# EAGLE board lf-antenna-usb (EAGLE 6.5.0)
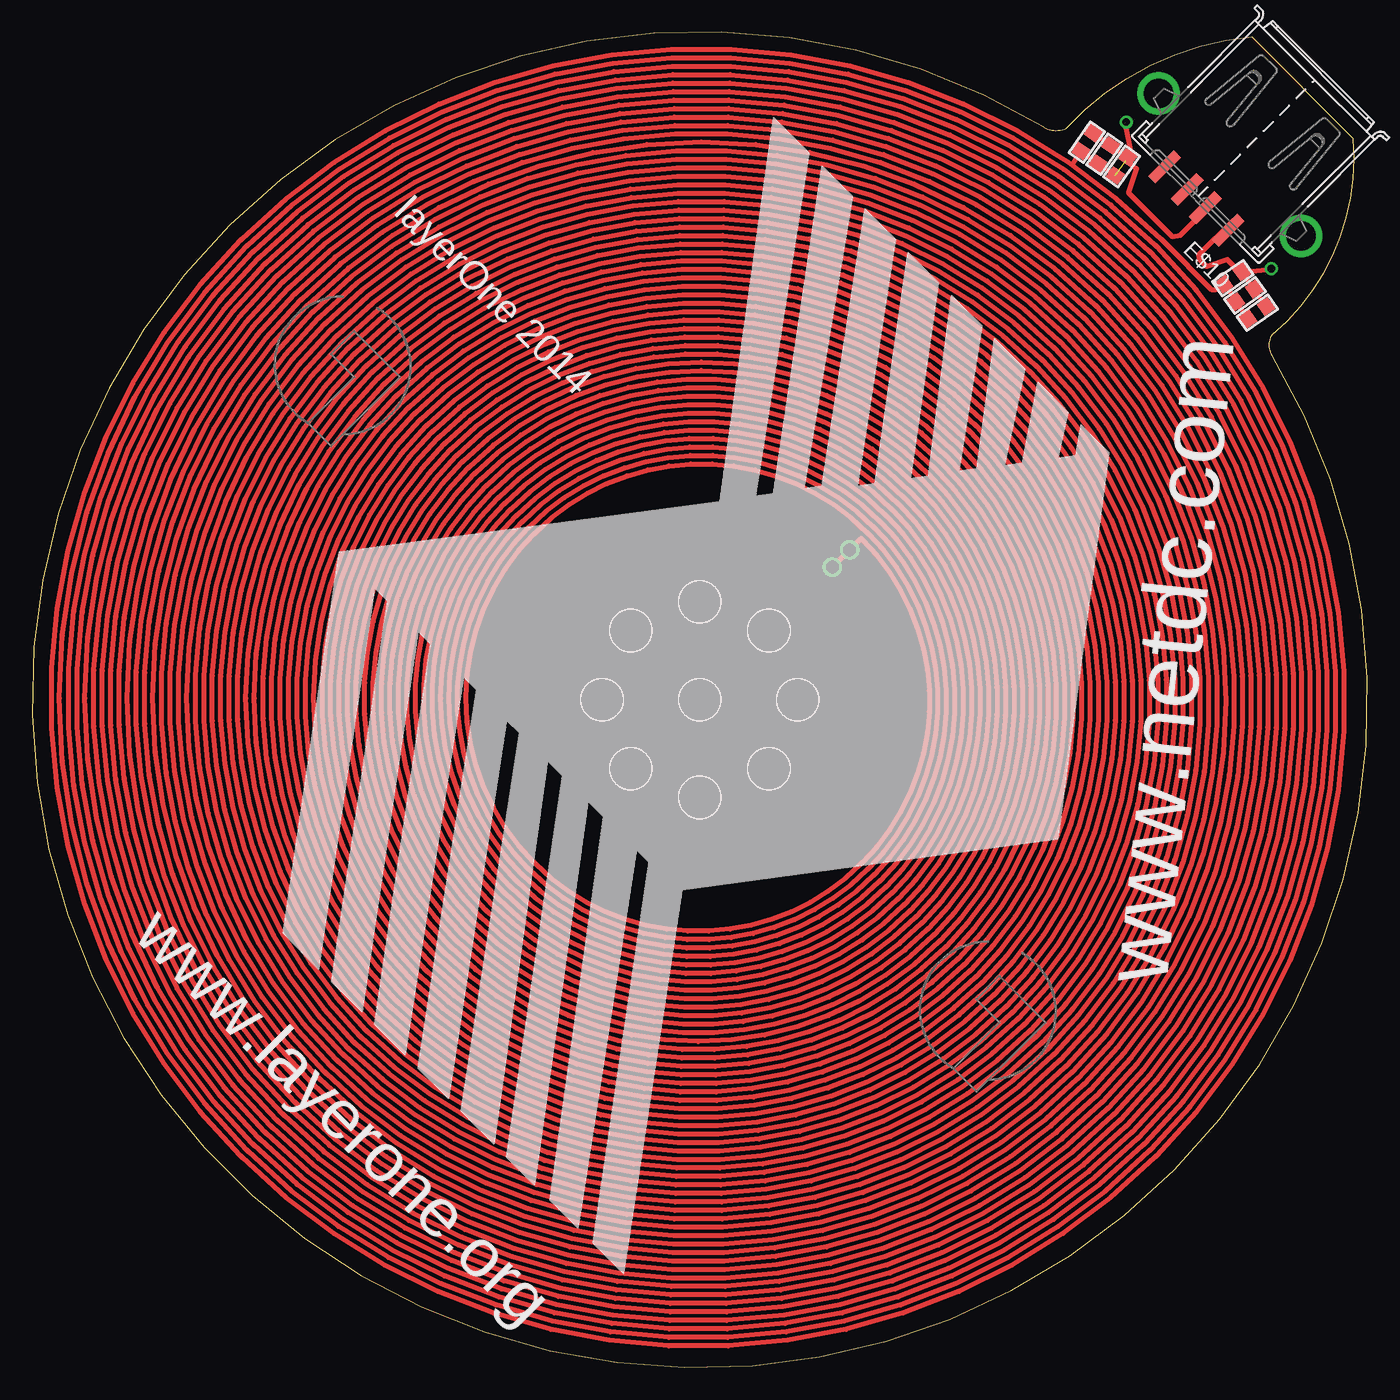
[diagram p0: board, top side]
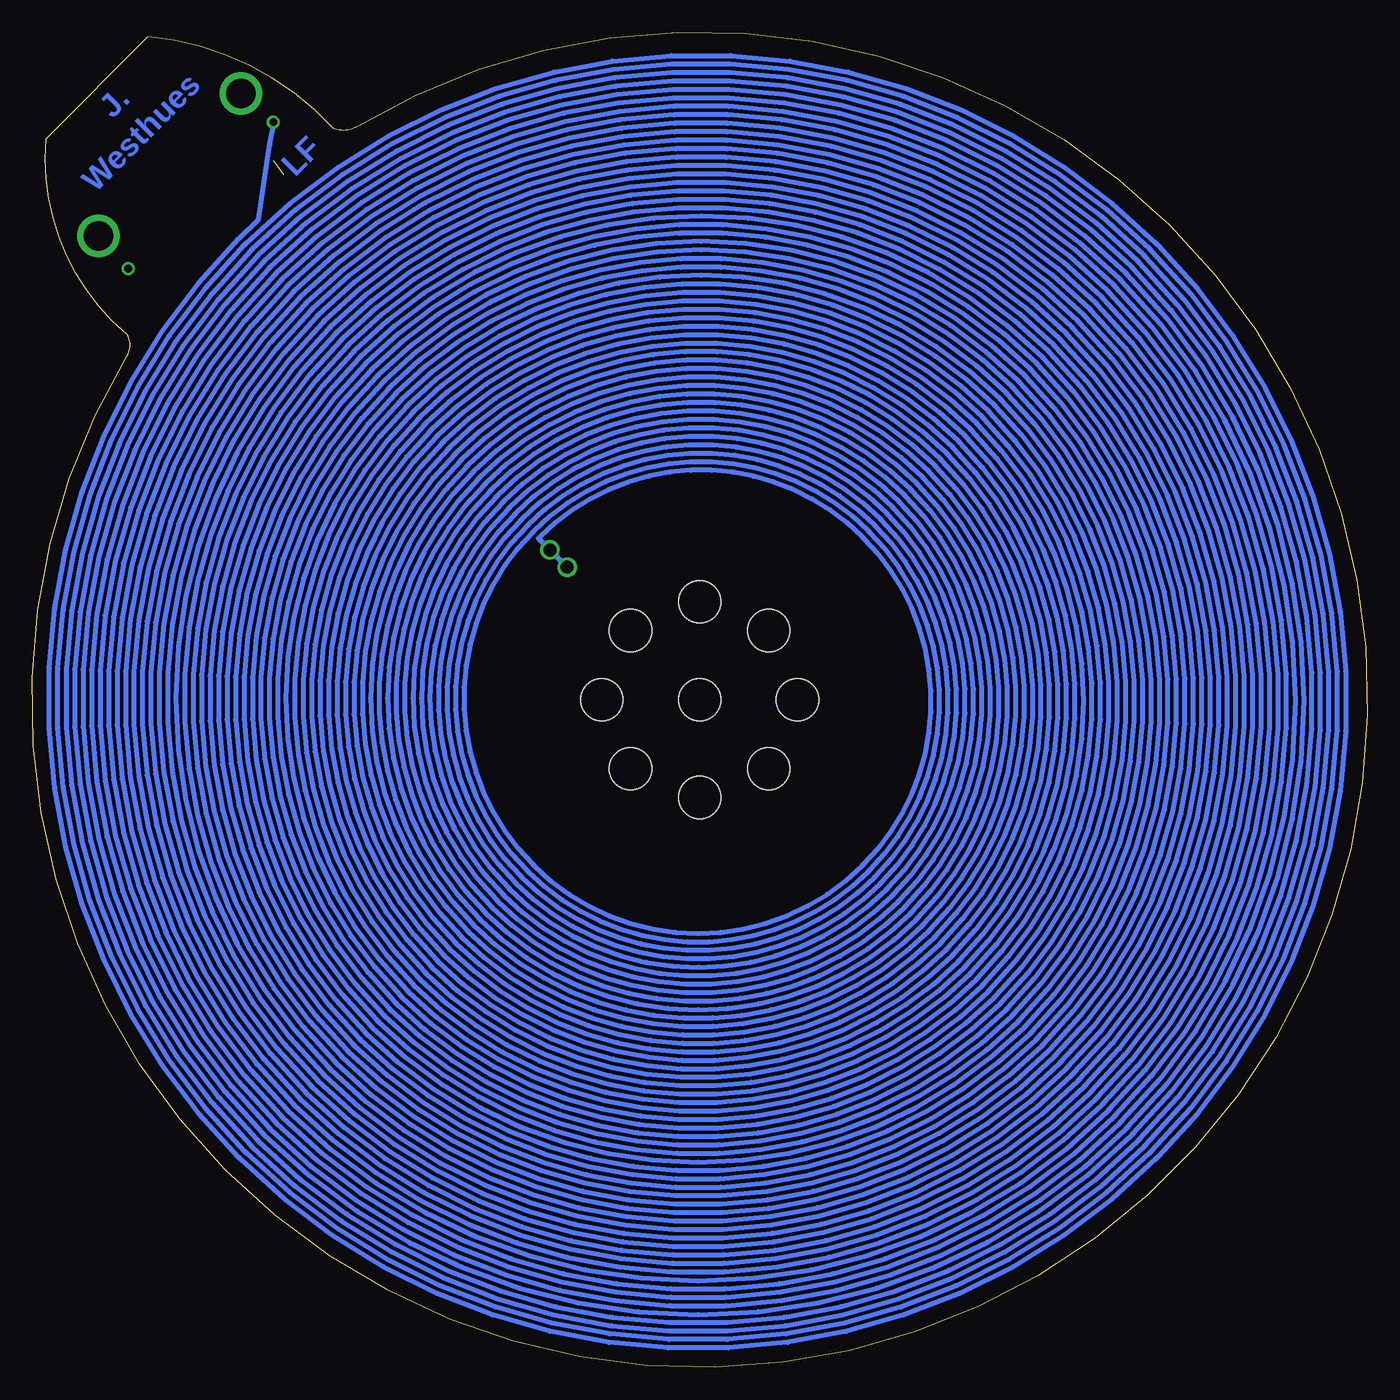
[diagram p1: board, bottom side, seen from below]

Size 104.1 x 104.1 mm. Coordinates in mm from the lower left corner, seen from the top.
Outline: 78.87,96.69 arc332 96.69,78.87 arc-62 96.69,80.52 arc55 103.01,95.8 95.08,103.73 arc42 80.61,96.6 arc-56 78.87,96.69
Copper layers (1*16): Top 0.0356mm / dielectric 1.5011mm / Bottom 0.0356mm
Design rules "SilverCircuits": minimum track width 7mil, minimum drill 14mil, track to track 7mil, track to pad 7mil, pad to pad 7mil, via to via 7mil, smd to smd 0mil, copper to edge 20mil, drill to drill 8mil, minimum pad ring 10mil, minimum via ring 8mil, stop-mask expansion 4mil, vias tented up to drill 0mil, thermal gap 10mil
Holes 3.3 mm at 52.06,52.06 46.67,46.67 46.67,57.44 57.44,46.67 57.44,57.44 52.06,44.44 59.68,52.06 52.06,59.68 44.44,52.06
Milling: 6 lines

## Footprints (pad centres in the part's own frame; a part is rotated, then mirrored left to right if it is on the bottom)
RLC_0603 = smd 1 x 1.1: 1 -0.85,0; 2 0.85,0
CONN_USB_A_F = smd 0.8 x 2.82: 1 -3.5,6.46; 2 -1,6.46; 3 1,6.46; 4 3.5,6.46 | drill 2.3: B1 -7.85,2.75; B2 7.85,2.75

## Placement (x,y rotation side)
E$1  [L1LOGO]  74.51,27.81 135 top
E$2  dnp  [RLC_0603]  84.94,93.62 235 top
E$3  1000 pF  [RLC_0603]  83.59,94.57 235 top
E$4  220 pF  [RLC_0603]  82.23,95.52 235 top
E$5  dnp  [RLC_0603]  95.5,82.22 215 top
E$6  dnp  [RLC_0603]  94.56,83.57 215 top
E$7  zerohm  [RLC_0603]  93.61,84.92 215 top
E$8  [L1LOGO]  24.22,78.1 135 top
E$10  [CONN_USB_A_F]  95.33,95.69 135 top

## Library data of the parts
E$1 E$8 = STM32-PROX
E$2-E$7 =   merged
E$10 = dp_devices; DIGIKEY: AE10332-ND; OEM: AU-Y1006-2-R

## Nets
BUFD: E$5.1 E$6.1 E$7.1
RAW: E$2.1 E$2.2 E$3.1 E$3.2 E$4.1 E$4.2 E$5.2 E$6.2 E$7.2

## Tracks (layer width: path | path; a pad name or v marks a point on that pad's centre or on a via)
BUFD
  Top 0.381: 96.25,82.69 E$5.1 95.25,84.12 E$6.1 | 95.36,83.97 95.31,84.05 E$6.1 | E$7.1 94.36,85.4 96.62,85.62 96.51,85.62 | E$7.1 94.35,85.37 E$6.1 | 93.58,89.37 90.94,86.73 91.03,86.36 91.57,85.82 93.19,86.36 94.26,85.28 94.26,85.37 E$7.1
RAW  (via drill 1)  (2 unrouted)
  Top 0.381: 64.63,64.63 64.75,64.51 arc-90 64.75,39.37 64.63,39.25 arc-90 39.25,39.25 39.13,39.37 arc-90 39.13,64.98 39.25,65.1 arc-90 65.1,65.1 65.21,64.98 arc-90 65.21,38.9 65.1,38.78 arc-90 38.78,38.78 38.67,38.9 arc-90 38.67,65.45 38.78,65.56 arc-90 65.56,65.56 65.68,65.45 arc-90 65.68,38.43 65.56,38.32 arc-90 38.32,38.32 38.2,38.43 arc-90 38.2,65.91 38.32,66.03 arc-90 66.03,66.03 66.15,65.91 arc-90 66.15,37.97 66.03,37.85 arc-90 37.85,37.85 37.73,37.97 arc-90 37.73,66.38 37.85,66.5 arc-90 66.5,66.5 66.61,66.38 arc-90 66.61,37.5 66.5,37.38 arc-90 37.38,37.38 37.27,37.5 arc-90 37.27,66.85 37.38,66.96 arc-90 66.96,66.96 67.08,66.85 arc-90 67.08,37.03 66.96,36.92 arc-90 36.92,36.92 36.8,37.03 arc-90 36.8,67.31 36.92,67.43 arc-90 67.43,67.43 67.55,67.31 arc-90 67.55,36.57 67.43,36.45 arc-90 36.45,36.45 36.33,36.57 arc-90 36.33,67.78 36.45,67.9 arc-90 67.9,67.9 68.01,67.78 arc-90 68.01,36.1 67.9,35.98 arc-90 35.98,35.98 35.86,36.1 arc-90 35.86,68.25 35.98,68.36 arc-90 68.36,68.36 68.48,68.25 arc-90 68.48,35.63 68.36,35.51 arc-90 35.51,35.51 35.4,35.63 arc-90 35.4,68.71 35.51,68.83 arc-90 68.83,68.83 68.95,68.71 arc-90 68.95,35.16 68.83,35.05 arc-90 35.05,35.05 34.93,35.16 arc-90 34.93,69.18 35.05,69.3 arc-90 69.3,69.3 69.41,69.18 arc-90 69.41,34.7 69.3,34.58 arc-90 34.58,34.58 34.46,34.7 arc-90 34.46,69.65 34.58,69.77 arc-90 69.77,69.77 69.88,69.65 arc-90 69.88,34.23 69.77,34.11 arc-90 34.11,34.11 34,34.23 arc-90 34,70.12 34.11,70.23 arc-90 70.23,70.23 70.35,70.12 arc-90 70.35,33.76 70.23,33.65 arc-90 33.65,33.65 33.53,33.76 arc-90 33.53,70.58 33.65,70.7 arc-90 70.7,70.7 70.82,70.58 arc-90 70.82,33.3 70.7,33.18 arc-90 33.18,33.18 33.06,33.3 arc-90 33.06,71.05 33.18,71.17 arc-90 71.17,71.17 71.28,71.05 arc-90 71.28,32.83 71.17,32.71 arc-90 32.71,32.71 32.6,32.83 arc-90 32.6,71.52 32.71,71.63 arc-90 71.63,71.63 71.75,71.52 arc-90 71.75,32.36 71.63,32.25 arc-90 32.25,32.25 32.13,32.36 arc-90 32.13,71.98 32.25,72.1 arc-90 72.1,72.1 72.22,71.98 arc-90 72.22,31.9 72.1,31.78 arc-90 31.78,31.78 31.66,31.9 arc-90 31.66,72.45 31.78,72.57 arc-90 72.57,72.57 72.68,72.45 arc-90 72.68,31.43 72.57,31.31 arc-90 31.31,31.31 31.2,31.43 arc-90 31.2,72.92 31.31,73.03 arc-90 73.03,73.03 73.15,72.92 arc-90 73.15,30.96 73.03,30.85 arc-90 30.85,30.85 30.73,30.96 arc-90 30.73,73.38 30.85,73.5 arc-90 73.5,73.5 73.62,73.38 arc-90 73.62,30.49 73.5,30.38 arc-90 30.38,30.38 30.26,30.49 arc-90 30.26,73.85 30.38,73.97 arc-90 73.97,73.97 74.08,73.85 arc-90 74.08,30.03 73.97,29.91 arc-90 29.91,29.91 29.79,30.03 arc-90 29.79,74.32 29.91,74.43 arc-90 74.43,74.43 74.55,74.32 arc-90 74.55,29.56 74.43,29.44 arc-90 29.44,29.44 29.33,29.56 arc-90 29.33,74.79 29.44,74.9 arc-90 74.9,74.9 75.02,74.79 arc-90 75.02,29.09 74.9,28.98 arc-90 28.98,28.98 28.86,29.09 arc-90 28.86,75.25 28.98,75.37 arc-90 75.37,75.37 75.49,75.25 arc-90 75.49,28.63 75.37,28.51 arc-90 28.51,28.51 28.39,28.63 arc-90 28.39,75.72 28.51,75.84 arc-90 75.84,75.84 75.95,75.72 arc-90 75.95,28.16 75.84,28.04 arc-90 28.04,28.04 27.93,28.16 arc-90 27.93,76.19 28.04,76.3 arc-90 76.3,76.3 76.42,76.19 arc-90 76.42,27.69 76.3,27.58 arc-90 27.58,27.58 27.46,27.69 arc-90 27.46,76.65 27.58,76.77 arc-90 76.77,76.77 76.89,76.65 arc-90 76.89,27.23 76.77,27.11 arc-90 27.11,27.11 26.99,27.23 arc-90 26.99,77.12 27.11,77.24 arc-90 77.24,77.24 77.35,77.12 arc-90 77.35,26.76 77.24,26.64 arc-90 26.64,26.64 26.53,26.76 arc-90 26.53,77.59 26.64,77.7 arc-90 77.7,77.7 77.82,77.59 arc-90 77.82,26.29 77.7,26.18 arc-90 26.18,26.18 26.06,26.29 arc-90 26.06,78.05 26.18,78.17 arc-90 78.17,78.17 78.29,78.05 arc-90 78.29,25.83 78.17,25.71 arc-90 25.71,25.71 25.59,25.83 arc-90 25.59,78.52 25.71,78.64 arc-90 78.64,78.64 78.75,78.52 arc-90 78.75,25.36 78.64,25.24 arc-90 25.24,25.24 25.12,25.36 arc-90 25.12,78.99 25.24,79.1 arc-90 79.1,79.1 79.22,78.99 arc-90 79.22,24.89 79.1,24.77 arc-90 24.77,24.77 24.66,24.89 arc-90 24.66,79.45 24.77,79.57 arc-90 79.57,79.57 79.69,79.45 arc-90 79.69,24.42 79.57,24.31 arc-90 24.31,24.31 24.19,24.42 arc-90 24.19,79.92 24.31,80.04 arc-90 80.04,80.04 80.16,79.92 arc-90 80.16,23.96 80.04,23.84 arc-90 23.84,23.84 23.72,23.96 arc-90 23.72,80.39 23.84,80.51 arc-90 80.51,80.51 80.62,80.39 arc-90 80.62,23.49 80.51,23.37 arc-90 23.37,23.37 23.26,23.49 arc-90 23.26,80.86 23.37,80.97 arc-90 80.97,80.97 81.09,80.86 arc-90 81.09,23.02 80.97,22.91 arc-90 22.91,22.91 22.79,23.02 arc-90 22.79,81.32 22.91,81.44 arc-90 81.44,81.44 81.56,81.32 arc-90 81.56,22.56 81.44,22.44 arc-90 22.44,22.44 22.32,22.56 arc-90 22.32,81.79 22.44,81.91 arc-90 81.91,81.91 82.02,81.79 arc-90 82.02,22.09 81.91,21.97 arc-90 21.97,21.97 21.86,22.09 arc-90 21.86,82.26 21.97,82.37 arc-90 82.37,82.37 82.49,82.26 arc-90 82.49,21.62 82.37,21.51 arc-90 21.51,21.51 21.39,21.62 arc-90 21.39,82.72 21.51,82.84 arc-90 82.84,82.84 82.96,82.72 arc-90 82.96,21.16 82.84,21.04 arc-90 21.04,21.04 20.92,21.16 arc-90 20.92,83.19 21.04,83.31 arc-90 83.31,83.31 83.42,83.19 arc-90 83.42,20.69 83.31,20.57 arc-90 20.57,20.57 20.45,20.69 arc-90 20.45,83.66 20.57,83.77 arc-90 83.77,83.77 83.89,83.66 arc-90 83.89,20.22 83.77,20.1 arc-90 20.1,20.1 19.99,20.22 arc-90 19.99,84.12 20.1,84.24 arc-90 84.24,84.24 84.36,84.12 arc-90 84.36,19.75 84.24,19.64 arc-90 19.64,19.64 19.52,19.75 arc-90 19.52,84.59 19.64,84.71 arc-90 84.71,84.71 84.83,84.59 arc-90 84.83,19.29 84.71,19.17 arc-90 19.17,19.17 19.05,19.29 arc-90 19.05,85.06 19.17,85.18 arc-90 85.18,85.18 85.29,85.06 arc-90 85.29,18.82 85.18,18.7 arc-90 18.7,18.7 18.59,18.82 arc-90 18.59,85.53 18.7,85.64 arc-90 85.64,85.64 85.76,85.53 arc-90 85.76,18.35 85.64,18.24 arc-90 18.24,18.24 18.12,18.35 arc-90 18.12,85.99 18.24,86.11 arc-90 86.11,86.11 86.23,85.99 arc-90 86.23,17.89 86.11,17.77 arc-90 17.77,17.77 17.65,17.89 arc-90 17.65,86.46 17.77,86.58 arc-90 86.58,86.58 86.69,86.46 arc-90 86.69,17.42 86.58,17.3 arc-90 17.3,17.3 17.19,17.42 arc-90 17.19,86.93 17.3,87.04 arc-90 87.04,87.04 87.16,86.93 arc-90 87.16,16.95 87.04,16.84 arc-90 16.84,16.84 16.72,16.95 arc-90 16.72,87.39 16.84,87.51 arc-90 87.51,87.51 87.63,87.39 arc-90 87.63,16.49 87.51,16.37 arc-90 16.37,16.37 16.25,16.49 arc-90 16.25,87.86 16.37,87.98 arc-90 87.98,87.98 88.25,87.71 91.93,84.03 92.29,84.03 92.65,84.39 92.87,84.39 E$7.2
  Top 0.381: v62.38,62.38 v63.73,63.73 64.63,64.63 | E$2.1 E$3.1 E$4.1 | E$2.2 84.38,92.98 84.32,92.97 84.32,93.02 83.22,93.81 E$3.2 83.08,93.84 83.07,93.89 81.78,94.71 81.76,94.79 | 81.76,94.79 E$4.2 | 81.76,94.79 81.08,93.79 | 85.24,97.02 85.33,97.05 85.24,96.8 85.6,94.87 E$2.1 | E$7.2 92.9,84.38 | 93.86,83.24 93.88,83.2 E$6.2 | E$6.2 93.81,83.09 | E$6.2 93.9,82.95 E$5.2 | E$7.2 93.01,84.39 E$6.2 | 64.63,64.63 | 91.94,90.66 89.53,88.25 88.88,88.16 85.46,91.57 86.09,93.46 85.28,94.08 E$2.1
  Bottom 0.381: v62.38,62.38 64.63,64.63 64.51,64.75 arc90 39.37,64.75 39.25,64.63 arc90 39.25,39.25 39.37,39.13 arc90 64.98,39.13 65.1,39.25 arc90 65.1,65.1 64.98,65.21 arc90 38.9,65.21 38.78,65.1 arc90 38.78,38.78 38.9,38.67 arc90 65.45,38.67 65.56,38.78 arc90 65.56,65.56 65.45,65.68 arc90 38.43,65.68 38.32,65.56 arc90 38.32,38.32 38.43,38.2 arc90 65.91,38.2 66.03,38.32 arc90 66.03,66.03 65.91,66.15 arc90 37.97,66.15 37.85,66.03 arc90 37.85,37.85 37.97,37.73 arc90 66.38,37.73 66.5,37.85 arc90 66.5,66.5 66.38,66.61 arc90 37.5,66.61 37.38,66.5 arc90 37.38,37.38 37.5,37.27 arc90 66.85,37.27 66.96,37.38 arc90 66.96,66.96 66.85,67.08 arc90 37.03,67.08 36.92,66.96 arc90 36.92,36.92 37.03,36.8 arc90 67.31,36.8 67.43,36.92 arc90 67.43,67.43 67.31,67.55 arc90 36.57,67.55 36.45,67.43 arc90 36.45,36.45 36.57,36.33 arc90 67.78,36.33 67.9,36.45 arc90 67.9,67.9 67.78,68.01 arc90 36.1,68.01 35.98,67.9 arc90 35.98,35.98 36.1,35.87 arc90 68.25,35.86 68.36,35.98 arc90 68.36,68.36 68.25,68.48 arc90 35.63,68.48 35.51,68.36 arc90 35.51,35.51 35.63,35.4 arc90 68.71,35.4 68.83,35.51 arc90 68.83,68.83 68.71,68.95 arc90 35.16,68.95 35.05,68.83 arc90 35.05,35.05 35.16,34.93 arc90 69.18,34.93 69.3,35.05 arc90 69.3,69.3 69.18,69.41 arc90 34.7,69.41 34.58,69.3 arc90 34.58,34.58 34.7,34.46 arc90 69.65,34.46 69.77,34.58 arc90 69.77,69.77 69.65,69.88 arc90 34.23,69.88 34.11,69.77 arc90 34.11,34.11 34.23,34 arc90 70.12,34 70.23,34.11 arc90 70.23,70.23 70.12,70.35 arc90 33.76,70.35 33.65,70.23 arc90 33.65,33.65 33.76,33.53 arc90 70.58,33.53 70.7,33.65 arc90 70.7,70.7 70.58,70.82 arc90 33.3,70.82 33.18,70.7 arc90 33.18,33.18 33.3,33.06 arc90 71.05,33.06 71.17,33.18 arc90 71.17,71.17 71.05,71.28 arc90 32.83,71.28 32.71,71.17 arc90 32.71,32.71 32.83,32.6 arc90 71.52,32.6 71.63,32.71 arc90 71.63,71.63 71.52,71.75 arc90 32.36,71.75 32.25,71.63 arc90 32.25,32.25 32.36,32.13 arc90 71.98,32.13 72.1,32.25 arc90 72.1,72.1 71.98,72.22 arc90 31.9,72.22 31.78,72.1 arc90 31.78,31.78 31.9,31.66 arc90 72.45,31.66 72.57,31.78 arc90 72.57,72.57 72.45,72.68 arc90 31.43,72.68 31.31,72.57 arc90 31.31,31.31 31.43,31.2 arc90 72.92,31.2 73.03,31.31 arc90 73.03,73.03 72.92,73.15 arc90 30.96,73.15 30.85,73.03 arc90 30.85,30.85 30.96,30.73 arc90 73.38,30.73 73.5,30.84 arc90 73.5,73.5 73.38,73.62 arc90 30.49,73.62 30.38,73.5 arc90 30.38,30.38 30.49,30.26 arc90 73.85,30.26 73.97,30.38 arc90 73.97,73.97 73.85,74.08 arc90 30.03,74.08 29.91,73.97 arc90 29.91,29.91 30.03,29.79 arc90 74.32,29.79 74.43,29.91 arc90 74.43,74.43 74.32,74.55 arc90 29.56,74.55 29.44,74.43 arc90 29.44,29.44 29.56,29.33 arc90 74.79,29.33 74.9,29.44 arc90 74.9,74.9 74.79,75.02 arc90 29.09,75.02 28.98,74.9 arc90 28.98,28.98 29.09,28.86 arc90 75.25,28.86 75.37,28.98 arc90 75.37,75.37 75.25,75.49 arc90 28.63,75.49 28.51,75.37 arc90 28.51,28.51 28.63,28.39 arc90 75.72,28.39 75.84,28.51 arc90 75.84,75.84 75.72,75.95 arc90 28.16,75.95 28.04,75.84 arc90 28.04,28.04 28.16,27.93 arc90 76.19,27.93 76.3,28.04 arc90 76.3,76.3 76.19,76.42 arc90 27.69,76.42 27.58,76.3 arc90 27.58,27.58 27.69,27.46 arc90 76.65,27.46 76.77,27.58 arc90 76.77,76.77 76.65,76.89 arc90 27.23,76.89 27.11,76.77 arc90 27.11,27.11 27.23,26.99 arc90 77.12,26.99 77.24,27.11 arc90 77.24,77.24 77.12,77.35 arc90 26.76,77.35 26.64,77.24 arc90 26.64,26.64 26.76,26.53 arc90 77.59,26.53 77.7,26.64 arc90 77.7,77.7 77.59,77.82 arc90 26.29,77.82 26.18,77.7 arc90 26.18,26.18 26.29,26.06 arc90 78.05,26.06 78.17,26.18 arc90 78.17,78.17 78.05,78.29 arc90 25.83,78.29 25.71,78.17 arc90 25.71,25.71 25.82,25.59 arc90 78.52,25.59 78.64,25.71 arc90 78.64,78.64 78.52,78.75 arc90 25.36,78.75 25.24,78.64 arc90 25.24,25.24 25.36,25.12 arc90 78.99,25.12 79.1,25.24 arc90 79.1,79.1 78.99,79.22 arc90 24.89,79.22 24.77,79.1 arc90 24.77,24.77 24.89,24.66 arc90 79.45,24.66 79.57,24.77 arc90 79.57,79.57 79.45,79.69 arc90 24.42,79.69 24.31,79.57 arc90 24.31,24.31 24.42,24.19 arc90 79.92,24.19 80.04,24.31 arc90 80.04,80.04 79.92,80.16 arc90 23.96,80.16 23.84,80.04 arc90 23.84,23.84 23.96,23.72 arc90 80.39,23.72 80.51,23.84 arc90 80.51,80.51 80.39,80.62 arc90 23.49,80.62 23.37,80.51 arc90 23.37,23.37 23.49,23.26 arc90 80.86,23.26 80.97,23.37 arc90 80.97,80.97 80.86,81.09 arc90 23.02,81.09 22.91,80.97 arc90 22.91,22.91 23.02,22.79 arc90 81.32,22.79 81.44,22.91 arc90 81.44,81.44 81.32,81.56 arc90 22.56,81.56 22.44,81.44 arc90 22.44,22.44 22.56,22.32 arc90 81.79,22.32 81.91,22.44 arc90 81.91,81.91 81.79,82.02 arc90 22.09,82.02 21.97,81.91 arc90 21.97,21.97 22.09,21.86 arc90 82.26,21.86 82.37,21.97 arc90 82.37,82.37 82.26,82.49 arc90 21.62,82.49 21.51,82.37 arc90 21.51,21.51 21.62,21.39 arc90 82.72,21.39 82.84,21.51 arc90 82.84,82.84 82.72,82.96 arc90 21.16,82.96 21.04,82.84 arc90 21.04,21.04 21.16,20.92 arc90 83.19,20.92 83.31,21.04 arc90 83.31,83.31 83.19,83.42 arc90 20.69,83.42 20.57,83.31 arc90 20.57,20.57 20.69,20.45 arc90 83.66,20.45 83.77,20.57 arc90 83.77,83.77 83.66,83.89 arc90 20.22,83.89 20.1,83.77 arc90 20.1,20.1 20.22,19.99 arc90 84.12,19.99 84.24,20.1 arc90 84.24,84.24 84.12,84.36 arc90 19.75,84.36 19.64,84.24 arc90 19.64,19.64 19.75,19.52 arc90 84.59,19.52 84.71,19.64 arc90 84.71,84.71 84.59,84.83 arc90 19.29,84.83 19.17,84.71 arc90 19.17,19.17 19.29,19.05 arc90 85.06,19.05 85.18,19.17 arc90 85.18,85.18 85.06,85.29 arc90 18.82,85.29 18.7,85.18 arc90 18.7,18.7 18.82,18.59 arc90 85.53,18.59 85.64,18.7 arc90 85.64,85.64 85.53,85.76 arc90 18.35,85.76 18.24,85.64 arc90 18.24,18.24 18.35,18.12 arc90 85.99,18.12 86.11,18.24 arc90 86.11,86.11 85.99,86.23 arc90 17.89,86.23 17.77,86.11 arc90 17.77,17.77 17.89,17.65 arc90 86.46,17.65 86.58,17.77 arc90 86.58,86.58 86.46,86.69 arc90 17.42,86.69 17.3,86.58 arc90 17.3,17.3 17.42,17.19 arc90 86.93,17.19 87.04,17.3 arc90 87.04,87.04 86.93,87.16 arc90 16.95,87.16 16.84,87.04 arc90 16.84,16.84 16.95,16.72 arc90 87.39,16.72 87.51,16.84 arc90 87.51,87.51 87.39,87.63 arc90 16.49,87.63 16.37,87.51 arc90 16.37,16.37 16.49,16.25 arc90 87.86,16.25 87.98,16.37 arc90 87.98,87.98 86.45,89.5 85.56,95.3 85.24,97.02
S$1  (via drill 0.6)
  other vias: 96.6,85.66
S$2  (via drill 0.6)
  other vias: 85.29,97.09

## Text on the board
Bottom: J. | LF | Westhues
tPlace: www.netdc.com | layerOne 2014 | www.layerone.org
bStop: LF
tDocu: sponsored by
bDocu: www.layerone.org | Badge Team | arko | charliex | krs | mmca | 2014